# Altium PCB PowerBreakout.PcbDoc
Units mil, origin at the board's own origin, x right, y up, seen from the top; angles counter-clockwise.
Board outline 5457.68 x 2951.77 mil, 2 copper layers (Top Layer, Bottom Layer); 73 components, 35 nets, 208 pads, 167 vias.
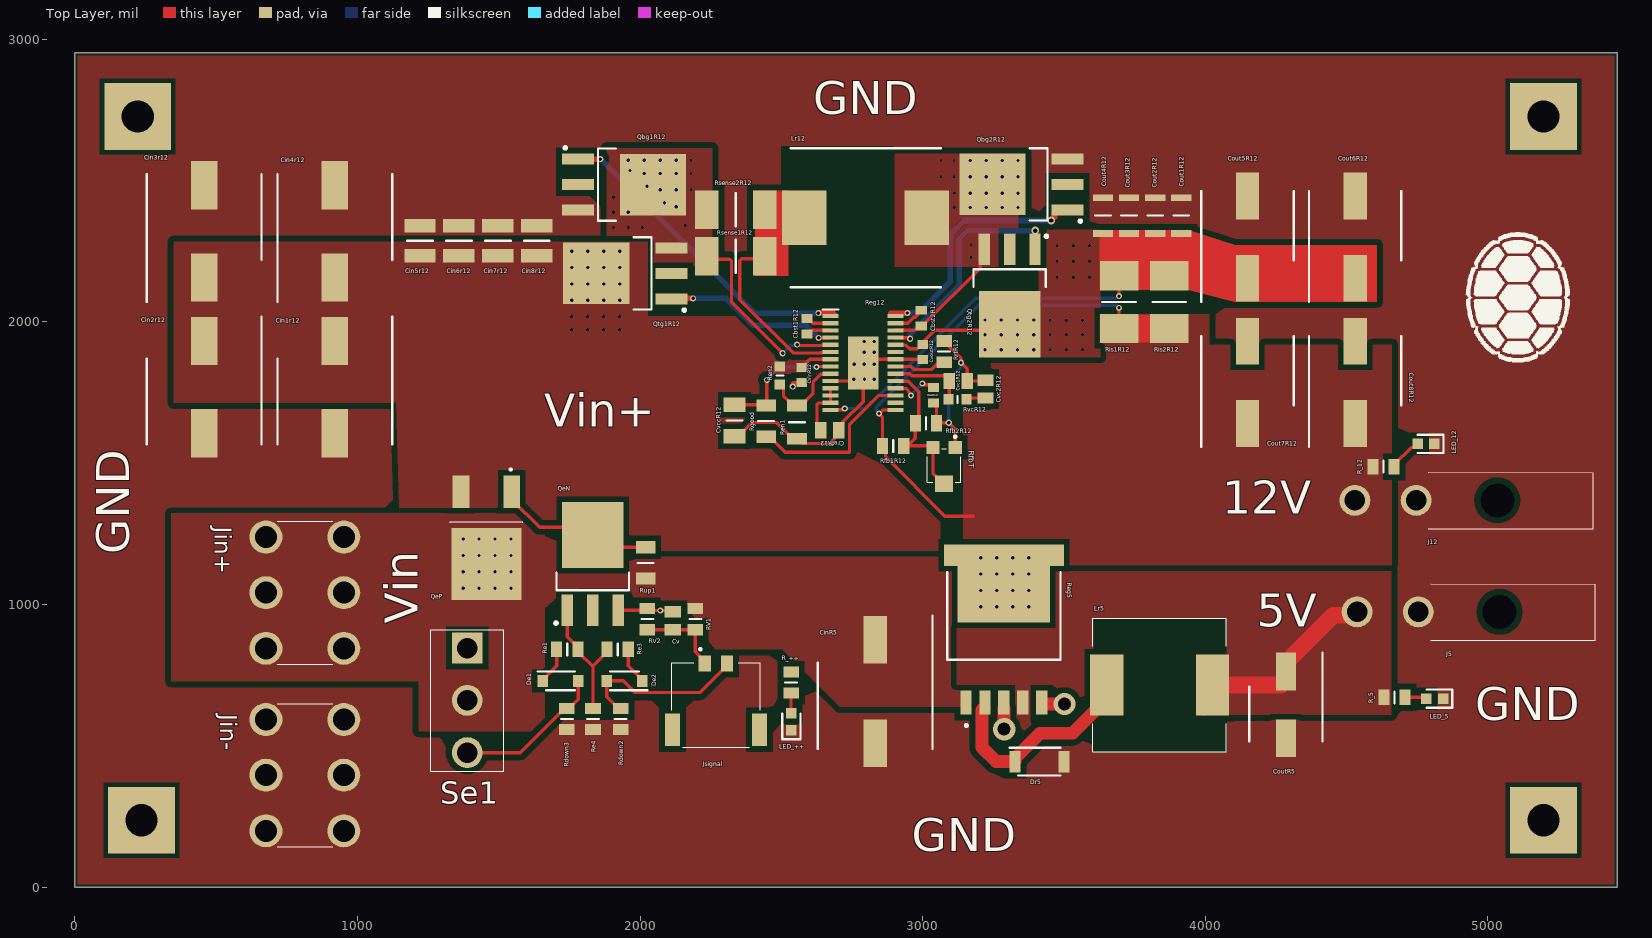
[diagram p0: Top Layer view]
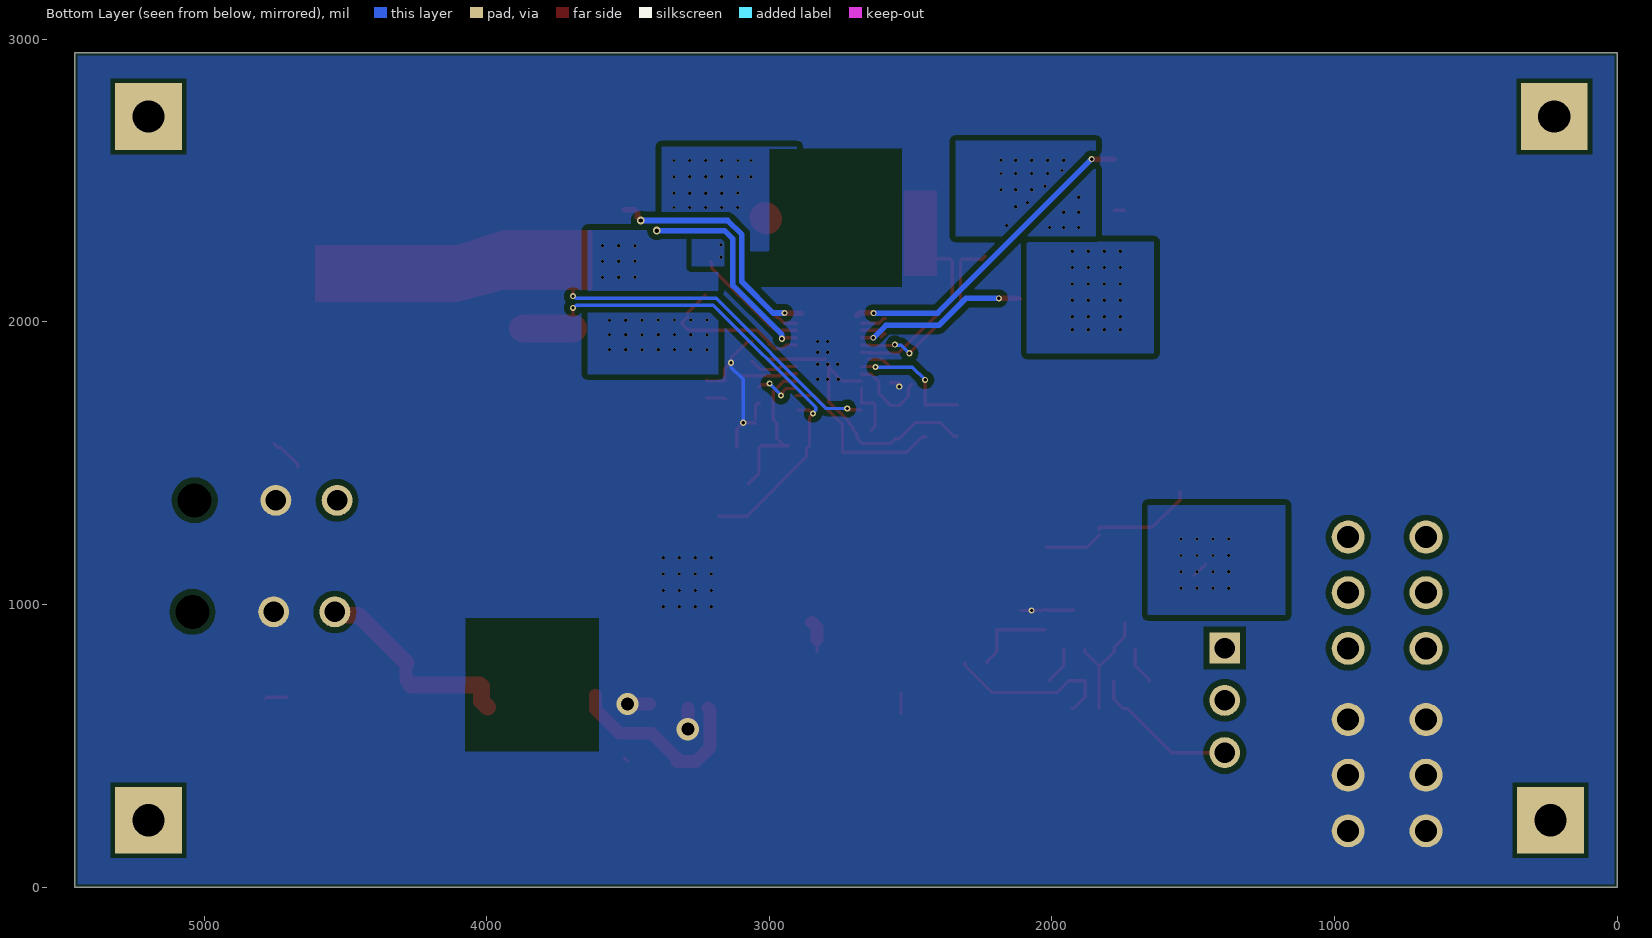
[diagram p1: Bottom Layer view, seen from below]
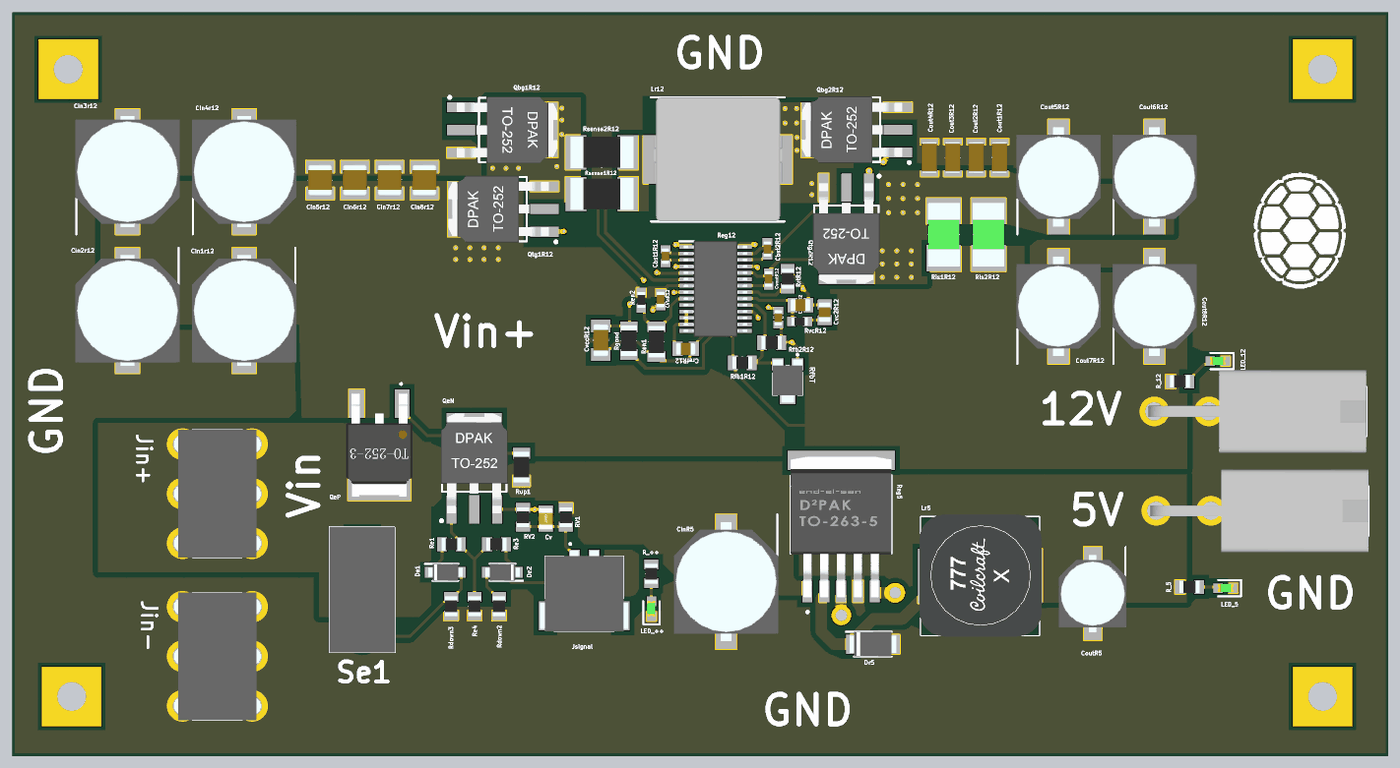
[diagram p2: 3D render of the assembled board from above, using the file's embedded part models]

## Layer stack, top to bottom
Top Solder: solder mask 0.4, Solder Resist, Dk 3.5
Top Layer: signal copper 4.1339
Dielectric 1: dielectric 12.6, FR-4, Dk 4.8
Bottom Layer: signal copper 4.1339
Bottom Solder: solder mask 0.4, Solder Resist, Dk 3.5

## Board outline
0,0 5457.68,0 5457.68,2951.77 0,2951.77

## Design rules (kind name [scope] priority, off if disabled: settings)
Clearance PolyClearance [InNamedPolygon('1_5V_L01_P009') Or InNamedPolygon('1_12V_L01_P007') Or InNamedPolygon('NETCBST1R12_1_L01_P010') Or InNamedPolygon('NETCBST2R12_1_L01_P001') Or InNamedPolygon('NETCOUT1R12_1_L01_P002') Or InNamedPolygon('P1++_L01_P005') Or InNamedPolygon('P1+_L01_P006') Or InNamedPolygon('P1+_L01_P011') Or InNamedPolygon('P1-_L01_P017') Or InNamedPolygon('NETCBST1R12_1_L02_P000') Or InNamedPolygon('NETCBST2R12_1_L02_P013') Or InNamedPolygon('NETCOUT1R12_1_L02_P014') Or InNamedPolygon('P1++_L02_P012') Or InNamedPolygon('P1+_L02_P015') Or InNamedPolygon('P1-_L02_P016')] p1: gap=20.39 ignorepadtopadclearanceinfootprint=FALSE
Clearance Clearance_1 [All] p2: gap=10 ignorepadtopadclearanceinfootprint=FALSE
PolygonConnect [All] p1: connectstyle=Direct reliefconductorwidth=10 reliefentries=4 polygonreliefangle="90 Angle" airgapwidth=10
RoutingVias [All] p1: holewidth=11.81 width=21.65 viastyle="Through Hole" minholewidth=7.87 minwidth=11.81 maxholewidth=45.67 maxwidth=78.74
SolderMaskExpansion [All] p1: expansion=4 istentingtop=FALSE
UnRoutedNet [All] p1: checkbadconnections=TRUE
Width [All] p1: maxlimit=282.68 minlimit=11.81 preferedwidth=11.81 minimp=50.000000 maximp=50.000000 favimp=50.000000
29 further rules are at their usual default settings.

## Components (designator, comment, footprint, x,y, rotation, side; value= is the part's Value field where it differs from the comment)
Cbst1R12 "0.1uF" CAPC1608X90N 2590.55,1984.25 r90 top
Cbst2R12 "0.1uF" CAPC1608X90N 2995.08,2012.8 r90 top
Cin1r12 "150uF" CAPAE1030X1650N 920.28,1768.7 r270 top
Cin2r12 "150uF" CAPAE1030X1650N 457.61,1768.7 r270 top
Cin3r12 "150uF" CAPAE1030X1650N 457.61,2319.88 r90 top
Cin4r12 "150uF" CAPAE1030X1650N 920.28,2319.88 r90 top
Cin5r12 "10uF" CAPC3225X280N 1221.46,2286.42 r90 top
Cin6r12 "10uF" CAPC3225X280N 1359.25,2286.42 r90 top
Cin7r12 "10uF" CAPC3225X280N 1497.05,2286.42 r90 top
Cin8r12 "10uF" CAPC3225X280N 1634.84,2286.42 r90 top
CinR5 "680uF" CAPAE1030X1050N 2831.69,691.93 r270 top
Cout1R12 "47uF" CAPC3216X180N 3915.35,2375.98 r90 top
Cout2R12 "47uF" CAPC3216X180N 3822.83,2375.98 r90 top
Cout3R12 "47uF" CAPC3216X180N 3730.31,2375.98 r90 top
Cout4R12 "47uF" CAPC3216X180N 3637.8,2375.98 r90 top
Cout5R12 "560uF" CAPAE830X1050N 4149.61,2299.21 r90 top
Cout6R12 "560uF" CAPAE830X1050N 4530.18,2299.21 r90 top
Cout7R12 "560uF" CAPAE830X1050N 4149.61,1785.43 r90 top
Cout8R12 "560uF" CAPAE830X1050N 4530.18,1785.43 r90 top
CoutR5 "220uF" CAPAE660X800N 4285.43,644.69 r270 top
CrefR12 "0.47uF" CAPC2012X140N 2671.26,1616.14 r0 top
CssR12 "0.1uF" CAPC1608X90N 3038.39,1740.16 r270 top
Cv "0.1uF" CAPC2012X100N 2116.14,942.32 r270 top
Cvc1R12 "100pF" CAPC2012X88N 3125.98,1790.35 r0 top
Cvc2R12 "15nF" CAPC2012X88N 3222.44,1761.81 r90 top
CvccR12 "4.7uF" CAPC3316X195N 2334.65,1650.59 r270 top
CVinR12 "1uF" CAPC1608X50N 2571.85,1812.01 r270 top
CvoutR12 "TMK107BLD105MA-T" CAPC1608X50N 3000,1893.7 r270 top
De1 "Schottky Diode" SODFL3517X110N 1718.5,729.33 r0 top
De2 "Schottky Diode" SODFL3517X110N 1944.88,729.33 r180 top
Dr5 "Schottky Diode" SODFL4725X110N 3413.39,443.9 r0 top
J5 "76825-0002" 768250002 4958.66,973.43 r90 top
J12 "76825-0002" 768250002 4950.79,1368.11 r90 top
Jin+ "7798" 7798 951.77,844.49 r90 top
Jin- "7798" 7798 951.77,198.82 r90 top
Jsignal "205338-0002" 2053380002 2268.7,791.34 r180 top
LED_5 "150060VS75000" LEDC1608X80N 4812.01,666.4 r180 top
LED_12 "150060VS75000" LEDC1608X80N 4781.5,1567.91 r180 top
LED_++ "150060VS75000" LEDC1608X80N 2535.43,584.65 r90 top
Lr5 "33uH" MSS1210333MEB 3838.58,714.57 r90 top
Lr12 "3.3uH" INDPM135125X650N 2798.23,2368.11 r0 top
Qbg1R12 "NTD5865NLT4G" TO229P990X238-4N 1943.9,2485.24 r0 top
Qbg2R12 "NTD5865NLT4G" TO229P990X238-4N 3349.41,2486.22 r180 top
QeN "N Channel" TO229P990X238-4N 1832.68,1142.72 r90 top
QeP "P Channel" STD36P4LLF6 1456.26,1266.61 r180 top
Qtg1R12 "NTD5865NLT4G" TO229P990X238-4N 1947.83,2171.26 r180 top
Qtg2R12 "NTD5865NLT4G" TO229P990X238-4N 3308.07,2093.5 r270 top
R_5 "150 Ohm" RESC2012X60N 4669.29,671.26 r180 top
R_12 "499 Ohm" RESC2012X60N 4630.91,1487.2 r180 top
R_++ "499 Ohm" RESC2012X60N 2534.45,723.43 r90 top
Rdown2 "10k" RESC2012X60N 1931.1,594.49 r270 top
Rdown3 "10k" RESC2012X60N 1741.14,594.49 r270 top
Re1 "10k" RESC2012X60N 1742.52,840.55 r180 top
Re3 "10k" RESC2012X60N 1920.87,840.55 r0 top
Re4 "10k" RESC2012X60N 1833.66,594.49 r270 top
Reg5 "LM2596S-5.0_NOPB" KTT0005B 3287.4,1144.13 r270 top
Reg12 "LT8390EFE#PBF" SOP65P640X120-29N 2789.37,1854.33 r0 top
Ren1 "56.2k" RESC3216X60N 2555.12,1644.68 r270 top
Ren2 "365k" RESC1608X55N 2495.08,1810.04 r270 top
Rfb1R12 "549k" RESC2012X65N 2895.67,1561.02 r0 top
Rfb2R12 "49.9k" RESC2113X66N 3011.81,1640.75 r0 top
RfbT "35WR100KLFTR" 35WR100KLFTR 3075.79,1491.14 r270 top
Rgood "100k" RESC3116X65N 2445.87,1648.62 r270 top
Ris1R12 "6m" FUSC6432X52N 3694.88,2069.88 r270 top
Ris2R12 "6m" FUSC6432X52N 3872.05,2069.88 r270 top
RrtR12 "309k" RESC2012X70N 3075.79,1894.68 r90 top
Rsense1R12 "2m" RESC6432X70N 2338.58,2231.3 r0 top
Rsense2R12 "2m" RESC6432X70N 2338.58,2396.65 r0 top
Rup1 "4.7k" RESC3116X65N 2019.68,1146.65 r270 top
RV1 "30k" RESC2012X60N 2195.87,947.83 r270 top
RV2 "10k" RESC2012X60N 2025.89,947.83 r270 top
RvcR12 "15k" RESC1608X55N 3123.03,1725.39 r0 top
Se1 "Manual Switch" 2M1SP3T1B1M2QE 1388.78,845.47 r270 top

## Footprints (in the part's own frame and the unit in brackets; to place one, negate y for a bottom-side part, rotate by r counter-clockwise, add the part's x,y. Pads: shape width x height; smd on the part's side, far side on the other; paste and mask are expansions set on the pad)
2M1SP3T1B1M2QE [mm]
  rect 2.775x2.775 hole 1.85: 1(0,0)
  round 2.775 hole 1.85: 2(4.7,0) 3(9.4,0)
  silkscreen extent -1.65,-3.3 11.05,3.3, body extent -1.65,-3.3 11.05,3.3, height 28.3
35WR100KLFTR [mm]
  rect 1.2x1.2 smd: 1(-1.625,1) 3(-1.625,-1)
  rect 1.5x1.6 smd: 2(1.625,0)
  silkscreen extent -2.7,-1.5 1.5,1.5, body extent -2.1,-1.5 2.22,1.5, height 1.9
7798 [mm]
  round 2.97 hole 1.98: 1(0,0) 2(5,0) 3(10,0) 4(10,7) 5(5,7) 6(0,7)
  silkscreen extent -1.44,1 11.44,6, body extent -1.44,-0.89 11.44,7.89, height 6.45
768250002 [mm]
  round 2.775 hole 1.85: 1(0,10.7) 2(0,5.2)
  round 1.525 hole 3.05 unplated: 3(0,-2.1)
  silkscreen extent -2.54,-10.7 2.54,4.1, body extent -4.18,-10.65 4.17,11.31, height 14.5
2053380002 [mm]
  rect 1.1x1.45 smd: 1(1,0) 2(-1,0)
  rect 1.35x2.9 smd: MP1(3.895,5.975) MP2(-3.895,5.975)
  silkscreen extent -3.98,-1.37 3.98,7.52, body extent -4.44,-0.62 4.44,7.52, height 2.9
CAPAE660X800N [mm]
  rect 3.4x1.8 smd: 1(-3,0) 2(3,0)
  silkscreen extent -4.7,-3.3 3.3,3.3, body extent -3.9,-3.4 3.9,3.4, height 8
CAPAE830X1050N [mm]
  rect 4.2x2.1 smd: 1(-3.7,0) 2(3.7,0)
  silkscreen extent -5.8,-4.15 4.15,4.15, body extent -5,-4.25 5,4.25, height 10.5
CAPAE1030X1050N [mm]
  rect 4.3x2.1 smd: 1(-4.65,0) 2(4.65,0)
  silkscreen extent -6.8,-5.15 5.15,5.15, body extent -6,-5.25 6,5.25, height 10.5
CAPAE1030X1650N [mm]
  rect 4.35x2.4 smd: 1(-4.15,0) 2(4.15,0)
  silkscreen extent -6.32,-5.15 5.15,5.15, body extent -5.6,-5.25 5.6,5.25, height 16.5
CAPC1608X50N [mm]
  rect 0.81x0.94 smd: 1(-0.67,0) 2(0.67,0)
  body extent -0.8,-0.4 0.8,0.4, height 0.5
CAPC1608X90N [mm]
  rect 0.78x0.99 smd: 1(-0.7,0) 2(0.7,0)
  body extent -0.8,-0.41 0.8,0.41, height 0.9
CAPC2012X88N [mm]
  rect 1.02x1.47 smd: 1(-0.8,0) 2(0.8,0)
  body extent -1,-0.63 1,0.63, height 0.88
CAPC2012X100N [mm]
  rect 1.02x1.47 smd: 1(-0.8,0) 2(0.8,0)
  body extent -1.1,-0.72 1.1,0.73, height 1
CAPC2012X140N [mm]
  rect 1.02x1.47 smd: 1(-0.81,0) 2(0.81,0)
  body extent -1,-0.63 1,0.63, height 1.4
CAPC3216X180N [mm]
  rect 0.62x1.82 smd: 1(-1.6,0) 2(1.6,0)
  silkscreen extent 0,-0.7 0,0.7, body extent -1.6,-0.8 1.6,0.8, height 1.8
CAPC3225X280N [mm]
  rect 1.22x2.82 smd: 1(-1.35,0) 2(1.35,0)
  silkscreen extent 0,-1.15 0,1.15, body extent -1.6,-1.25 1.6,1.25, height 2.8
CAPC3316X195N [mm]
  rect 1.28x1.96 smd: 1(-1.42,0) 2(1.42,0)
  silkscreen extent 0,-0.7 0,0.7, body extent -1.65,-0.8 1.65,0.8, height 1.95
FUSC6432X52N [mm]
  rect 2.63x3.46 smd: 1(-2.37,0) 2(2.37,0)
  silkscreen extent 0,-1.5 0,1.5, body extent -3.2,-1.6 3.2,1.6, height 0.52
INDPM135125X650N [mm]
  rect 4x4.9 smd: 1(-5.5,0) 2(5.5,0)
  silkscreen extent -6.75,-6.25 6.75,6.25, body extent -6.42,-6.22 6.48,6.28, height 6.32
KTT0005B [mm]
  rect 2.16x1.02 smd: 1(12.461,-3.4) 2(12.461,-1.7) 3(12.461,0) 4(12.461,1.7) 5(12.461,3.4)
  rect 6.99x8.33 smd: 6(1.786,0)
  rect 1.91x1.235 smd: 7(-0.754,4.782) 8(-0.754,-4.782)
  silkscreen extent 0.76,-5.08 14.68,5.08, body extent -1.15,-5.08 13.09,5.08, height 4.87
LEDC1608X80N [mm]
  rect 0.95x0.95 smd: 1(-0.75,0) 2(0.75,0)
  silkscreen extent -1.58,-0.82 0.75,0.82, body extent -0.8,-0.4 0.8,0.4, height 0.81
MSS1210333MEB [mm]
  rect 5.5x3 smd: 1(0,4.75) 2(0,-4.75)
  silkscreen extent -6,-6 6,6, body extent -6.1,-6.2 6.2,6.1, height 10.17
RESC1608X55N [mm]
  rect 0.9x0.95 smd: 1(-0.8,0) 2(0.8,0)
  silkscreen extent 0,-0.3 0,0.3, body extent -0.8,-0.4 0.8,0.4, height 0.55
RESC2012X60N [mm]
  rect 1x1.4 smd: 1(-0.95,0) 2(0.95,0)
  silkscreen extent 0,-0.53 0,0.53, body extent -1,-0.63 1,0.63, height 0.6
RESC2012X65N [mm]
  rect 1x1.45 smd: 1(-0.95,0) 2(0.95,0)
  silkscreen extent 0,-0.53 0,0.53, body extent -1,-0.63 1,0.63, height 0.65
RESC2012X70N [mm]
  rect 1.05x1.4 smd: 1(-0.95,0) 2(0.95,0)
  silkscreen extent 0,-0.53 0,0.53, body extent -1,-0.63 1,0.63, height 0.7
RESC2113X66N [mm]
  rect 1x1.45 smd: 1(-0.95,0) 2(0.95,0)
  silkscreen extent 0,-0.54 0,0.54, body extent -1.03,-0.64 1.03,0.64, height 0.66
RESC3116X65N [mm]
  rect 1.1x1.75 smd: 1(-1.4,0) 2(1.4,0)
  silkscreen extent 0,-0.7 0,0.7, body extent -1.55,-0.8 1.55,0.8, height 0.65
RESC3216X60N [mm]
  rect 1.05x1.8 smd: 1(-1.5,0) 2(1.5,0)
  silkscreen extent 0,-0.7 0,0.7, body extent -1.58,-0.8 1.58,0.8, height 0.6
RESC6432X70N [mm]
  rect 2.1x3.45 smd: 1(-2.6,0) 2(2.6,0)
  silkscreen extent 0,-1.49 0,1.49, body extent -3.17,-1.59 3.17,1.59, height 0.7
SODFL3517X110N [mm]
  rect 0.92x1.08 smd: 1(-1.6,0) 2(1.6,0)
  silkscreen extent -2.06,-0.85 1.3,0.85, body extent -1.75,-0.85 1.75,0.85, height 1.1
SODFL4725X110N [mm]
  rect 1x1.93 smd: 1(-2.2,0) 2(2.2,0)
  silkscreen extent -2.7,-1.25 1.9,1.25, body extent -2.35,-1.25 2.35,1.25, height 1.1
SOP65P640X120-29N [mm]
  rect 1.45x0.381 smd: 1(-2.925,4.225) 2(-2.925,3.575) 3(-2.925,2.925) 4(-2.925,2.275) 5(-2.925,1.625) 6(-2.925,0.975) 7(-2.925,0.325) 8(-2.925,-0.325) 9(-2.925,-0.975) 10(-2.925,-1.625) 11(-2.925,-2.275) 12(-2.925,-2.925) 13(-2.925,-3.575) 14(-2.925,-4.225) 15(2.925,-4.225) 16(2.925,-3.575) 17(2.925,-2.925) 18(2.925,-2.275) 19(2.925,-1.625) 20(2.925,-0.975) 21(2.925,-0.325) 22(2.925,0.325) 23(2.925,0.975) 24(2.925,1.625) 25(2.925,2.275) 26(2.925,2.925) 27(2.925,3.575) 28(2.925,4.225)
  rect 2.74x4.75 smd: 29(0,0)
  silkscreen extent -3.65,4.8 -2.2,4.8, body extent -3.2,-4.85 3.2,4.85, height 1.2
STD36P4LLF6 [mm]
  rect 1.5x2.9 smd: 1(-2.286,-3.353) 3(2.286,-3.353)
  rect 6.3x6.5 smd: 2(0,3.147)
  silkscreen extent -3.25,-5.45 3.25,-0.55, body extent -3.35,-4.35 3.35,6, height 2.42
TO229P990X238-4N [mm]
  rect 2.85x1 smd: 1(-4.15,2.29) 2(-4.15,0) 3(-4.15,-2.29)
  rect 5.95x5.55 smd: 4(2.6,0)
  silkscreen extent -5.42,-3.25 -0.75,3.42, body extent -4.57,-3.37 5.53,3.37, height 2.41

## Part data
Cbst1R12 Cbst2R12 CssR12: library part 06033C104J4Z2A, "Capacitor", Manufacturer_Name=AVX, Mouser Part Number=581-06033C104J4Z2A, Datasheet Link=https://componentsearchengine.com/Datasheets/1/06031A100FAT2A.pdf, Height=0.9mm, Manufacturer_Part_Number=06033C104J4Z2A, Mouser Price/Stock=https://www.mouser.co.uk/ProductDetail/AVX/06033C104J4Z2A/?qs=%252BdQmOuGyFcHWXuPUAM5ybw%3D%3D
Cin1r12 Cin2r12 Cin3r12 Cin4r12: library part EEH-ZS1J151P, "Capacitor Polarised", Manufacturer_Name=Panasonic, Mouser Part Number=667-EEH-ZS1J151P, Arrow Part Number=EEH-ZS1J151P, Arrow Price/Stock=https://www.arrow.com/en/products/eeh-zs1j151p/panasonic, Datasheet Link=https://industrial.panasonic.com/cdbs/www-data/pdf/RDD0000/RDD0000C1244.pdf, Height=16.5mm, Manufacturer_Part_Number=EEH-ZS1J151P, Mouser Price/Stock=https://www.mouser.co.uk/ProductDetail/Panasonic/EEH-ZS1J151P?qs=byeeYqUIh0Ma2Xd%2FUydcug%3D%3D
Cin5r12 Cin6r12 Cin7r12 Cin8r12: library part UMR325AC7106KM-P, "Capacitor", Manufacturer_Name="TAIYO YUDEN", Mouser Part Number=963-UMR325AC7106KM-P, Datasheet Link=https://www.mouser.it/datasheet/2/396/TaiyoYuden_UMR325AC7106KM-P_SS-1888197.pdf, Height=2.8mm, Manufacturer_Part_Number=UMR325AC7106KM-P, Mouser Price/Stock=https://www.mouser.co.uk/ProductDetail/Taiyo-Yuden/UMR325AC7106KM-P?qs=W%2FMpXkg%252BdQ6B9FeGpdJ2Gw%3D%3D
CinR5: library part EEE-FK1C681GP, "Capacitor Polarised", Manufacturer_Name=Panasonic, Mouser Part Number=667-EEE-FK1C681GP, Arrow Part Number=EEE-FK1C681GP, Arrow Price/Stock=https://www.arrow.com/en/products/eee-fk1c681gp/panasonic, Datasheet Link=https://www.arrow.com/en/products/eee-fk1c681gp/panasonic, Height=10.5mm, Manufacturer_Part_Number=EEE-FK1C681GP, Mouser Price/Stock=https://www.mouser.com/Search/Refine.aspx?Keyword=667-EEE-FK1C681GP
Cout1R12 Cout2R12 Cout3R12 Cout4R12: library part C3216X5R1E476M160AC, "Capacitor", Manufacturer_Name=TDK, Mouser Part Number=810-C3216X5R1E476M, Arrow Part Number=C3216X5R1E476M160AC, Arrow Price/Stock=https://www.arrow.com/en/products/c3216x5r1e476m160ac/tdk, Datasheet Link=https://product.tdk.com/info/en/catalog/datasheets/mlcc_commercial_midvoltage_en.pdf, Height=1.8mm, Manufacturer_Part_Number=C3216X5R1E476M160AC, Mouser Price/Stock=https://www.mouser.co.uk/ProductDetail/TDK/C3216X5R1E476M160AC?qs=NRhsANhppD%252BqapdVvBvu4Q%3D%3D
Cout5R12 Cout6R12 Cout7R12 Cout8R12: library part EEE-FT1E561UP, "Capacitor", Manufacturer_Name=Panasonic, Mouser Part Number=667-EEE-FT1E561UP, Arrow Part Number=EEE-FT1E561UP, Arrow Price/Stock=https://www.arrow.com/en/products/eee-ft1e561up/panasonic, Datasheet Link=https://componentsearchengine.com/Datasheets/1/EEE-FT1E561UP.pdf, Height=10.5mm, Manufacturer_Part_Number=EEE-FT1E561UP, Mouser Price/Stock=https://www.mouser.com/Search/Refine.aspx?Keyword=667-EEE-FT1E561UP
CoutR5: library part EEE-FKA221XAP, "Capacitor Polarised", Manufacturer_Name=Panasonic, Mouser Part Number=667-EEE-FKA221XAP, Datasheet Link=https://eu.mouser.com/datasheet/2/315/ABA0000C1175-947561.pdf, Height=8mm, Manufacturer_Part_Number=EEE-FKA221XAP, Mouser Price/Stock=https://www.mouser.com/Search/Refine.aspx?Keyword=667-EEE-FKA221XAP
CrefR12: library part 08053C474KAT2A, "Capacitor", Manufacturer_Name=AVX, Mouser Part Number=581-08053C474KAT2A, Datasheet Link=http://www.mouser.com/ds/2/40/X7RDielectric-777024.pdf, Height=1.4mm, Manufacturer_Part_Number=08053C474KAT2A, Mouser Price/Stock=https://www.mouser.co.uk/ProductDetail/AVX/08053C474KAT2A?qs=KSXCHhUSl%2FcOKBGY0p43NQ%3D%3D
Cv: library part C0805C101FCGACAUTO, "Capacitor", Manufacturer_Name=Kemet, Mouser Part Number=80-C0805C101FCGACAUT, Datasheet Link=https://content.kemet.com/datasheets/KEM_C1091_C0G_ESD.pdf, Height=1mm, Manufacturer_Part_Number=C0805C101FCGACAUTO, Mouser Price/Stock=https://www.mouser.co.uk/ProductDetail/KEMET/C0805C101FCGACAUTO/?qs=OlC7AqGiEDnYvzW7uZC9yw%3D%3D
Cvc1R12: library part C0805C101J5RACTU, "Capacitor", Manufacturer_Name=Kemet, Mouser Part Number=80-C0805C101J5R, Arrow Part Number=C0805C101J5RACTU, Arrow Price/Stock=https://www.arrow.com/en/products/c0805c101j5ractu/kemet-corporation, Datasheet Link=https://api.kemet.com/component-edge/download/datasheet/C0805C101J5RACTU.pdf, Height=0.88mm, Manufacturer_Part_Number=C0805C101J5RACTU, Mouser Price/Stock=https://www.mouser.co.uk/ProductDetail/KEMET/C0805C101J5RACTU?qs=1CrpdQ4AkN%2FJNeoQfmjuPQ%3D%3D
Cvc2R12: library part C0805C151JAGACTU, "Capacitor", Manufacturer_Name=Kemet, Mouser Part Number=80-C0805C151JAGACTU, Datasheet Link=https://www.mouser.ch/datasheet/2/212/KEM_C1003_C0G_SMD-1101588.pdf, Height=0.88mm, Manufacturer_Part_Number=C0805C151JAGACTU, Mouser Price/Stock=https://www.mouser.co.uk/ProductDetail/KEMET/C0805C151JAGACTU?qs=rrS6PyfT74cmtFsCFUoXhw%3D%3D
CvccR12: library part C1206X475K3RACAUTO7210, "Capacitor", Manufacturer_Name=Kemet, Mouser Part Number=80-C1206X475K3RAUTLR, Datasheet Link=https://www.mouser.com/datasheet/2/212/1/KEM_C1078_X7R_FT_CAP_AUTO_SMD-1103315.pdf, Height=1.95mm, Manufacturer_Part_Number=C1206X475K3RACAUTO7210, Mouser Price/Stock=https://www.mouser.co.uk/ProductDetail/KEMET/C1206X475K3RACAUTO7210/?qs=ds50AKTGxA8JAgT9kv9azQ%3D%3D
CVinR12: library part TMK107BLD105MA-T, "Capacitor", Manufacturer_Name="TAIYO YUDEN", Mouser Part Number=963-TMK107BLD105MA-T, Datasheet Link=https://mouser.componentsearchengine.com/Datasheets/1/TMK107BLD105MA-T.pdf, Height=0.5mm, Manufacturer_Part_Number=TMK107BLD105MA-T, Mouser Price/Stock=https://www.mouser.co.uk/ProductDetail/Taiyo-Yuden/TMK107BLD105MA-T?qs=lkMpTOwszhd9%2FVKw3feWjA%3D%3D
CvoutR12: "Capacitor", Manufacturer_Name="TAIYO YUDEN", Mouser Part Number=963-TMK107BLD105MA-T, Datasheet Link=https://mouser.componentsearchengine.com/Datasheets/1/TMK107BLD105MA-T.pdf, Height=0.5mm, Manufacturer_Part_Number=TMK107BLD105MA-T, Mouser Price/Stock=https://www.mouser.co.uk/ProductDetail/Taiyo-Yuden/TMK107BLD105MA-T?qs=lkMpTOwszhd9%2FVKw3feWjA%3D%3D
De1 De2: library part PMEG4030ER,115, "Diode", Manufacturer_Name=Nexperia, Mouser Part Number=771-PMEG4030ER115, Arrow Part Number=PMEG4030ER,115, Arrow Price/Stock=https://www.arrow.com/en/products/pmeg4030er115/nexperia, Datasheet Link=https://assets.nexperia.com/documents/data-sheet/PMEG4030ER.pdf, Height=1.1mm, Manufacturer_Part_Number=PMEG4030ER,115, Mouser Price/Stock=https://www.mouser.co.uk/ProductDetail/Nexperia/PMEG4030ER115?qs=GcY6OjH1zdm%2Fc340ECNPOw%3D%3D
Dr5: library part PMEG4030EP,115, "Diode", Manufacturer_Name=Nexperia, Mouser Part Number=771-PMEG4030EP,115, RS Part Number=7816786P, Datasheet Link=http://www.mouser.com/ds/2/302/PMEG4030EP-842598.pdf, Height=1.1mm, Manufacturer_Part_Number=PMEG4030EP,115, Mouser Price/Stock=https://www.mouser.com/Search/Refine.aspx?Keyword=771-PMEG4030EP%2C115, RS Price/Stock=http://uk.rs-online.com/web/p/products/7816786P
J5 J12: "Connector", Manufacturer_Name=Molex, Mouser Part Number=538-76825-0002, Datasheet Link=https://www.molex.com/pdm_docs/sd/768250002_sd.pdf, Height=14mm, Manufacturer_Part_Number=76825-0002, Mouser Price/Stock=https://www.mouser.co.uk/ProductDetail/Molex/76825-0002?qs=KpdAywxU011SrMvnYgR78w%3D%3D
Jin+ Jin-: "Connector", Manufacturer_Name="Keystone Electronics", Mouser Part Number=534-7798, Datasheet Link=http://www.keyelco.com/product-pdf.cfm?p=1116, Height=6.35mm, Manufacturer_Part_Number=7798, Mouser Price/Stock=https://www.mouser.co.uk/ProductDetail/Keystone-Electronics/7798?qs=%2F%252BPMR94VuMZQhfU8Ma0DGQ%3D%3D
Jsignal: "Connector", Manufacturer_Name=Molex, Mouser Part Number=538-205338-0002, Datasheet Link=https://eu.mouser.com/datasheet/2/276/2053380002_PCB_HEADERS-1839579.pdf, Height=2.8mm, Manufacturer_Part_Number=205338-0002, Mouser Price/Stock=https://www.mouser.co.uk/ProductDetail/Molex/205338-0002?qs=GedFDFLaBXGw%2FZd7htQeEw%3D%3D
LED_5 LED_12 LED_++: "LED", Manufacturer_Name="Wurth Elektronik", Mouser Part Number=710-150060VS75000, Datasheet Link=https://componentsearchengine.com/Datasheets/2/150060VS75000.pdf, Height=0.8mm, Manufacturer_Part_Number=150060VS75000, Mouser Price/Stock=https://www.mouser.co.uk/ProductDetail/Wurth-Elektronik/150060VS75000/?qs=LlUlMxKIyB1Q1Bi5mQ%2FKLw%3D%3D
Lr5: library part MSS1210-333MEB, "Inductor", Manufacturer_Name=COILCRAFT, Mouser Part Number=994-MSS1210-333MEB, Datasheet Link=https://www.coilcraft.com/getmedia/f1a1bc5f-bdff-42f8-9ca8-1a0fb1d5094f/MSS1210.pdf, Height=10.2mm, Manufacturer_Part_Number=MSS1210-333MEB, Mouser Price/Stock=https://www.mouser.co.uk/ProductDetail/Coilcraft/MSS1210-333MEB?qs=VJjuEbE9QBMJhExHFP9gkQ%3D%3D
Lr12: library part SRP1265A-3R3M, "Inductor", Manufacturer_Name=Bourns, Mouser Part Number=652-SRP1265A-3R3M, Arrow Part Number=SRP1265A-3R3M, Arrow Price/Stock=https://www.arrow.com/en/products/srp1265a-3r3m/bourns, Datasheet Link=https://www.bourns.com/data/global/pdfs/SRP1265A.pdf, Height=6.5mm, Manufacturer_Part_Number=SRP1265A-3R3M, Mouser Price/Stock=https://www.mouser.co.uk/ProductDetail/Bourns/SRP1265A-3R3M?qs=7z%252BmIopC6%2FKn2Zz%252BiwrXSg%3D%3D
Qbg1R12 Qbg2R12 Qtg1R12 Qtg2R12: "Transistor", Manufacturer_Name="ON Semiconductor", Mouser Part Number=863-NTD5865NLT4G, Arrow Part Number=NTD5865NLT4G, Arrow Price/Stock=https://www.arrow.com/en/products/ntd5865nlt4g/on-semiconductor, Datasheet Link=http://www.onsemi.com/pub/Collateral/NTD5865NL-D.PDF, Height=2.38mm, Manufacturer_Part_Number=NTD5865NLT4G, Mouser Price/Stock=https://www.mouser.co.uk/ProductDetail/ON-Semiconductor/NTD5865NLT4G?qs=CKZJJkUYzP4m2wg5Rm81cw%3D%3D
QeN: library part NTD5865NLT4G, "Transistor", Manufacturer_Name="ON Semiconductor", Mouser Part Number=863-NTD5865NLT4G, Arrow Part Number=NTD5865NLT4G, Arrow Price/Stock=https://www.arrow.com/en/products/ntd5865nlt4g/on-semiconductor, Datasheet Link=http://www.onsemi.com/pub/Collateral/NTD5865NL-D.PDF, Height=2.38mm, Manufacturer_Part_Number=NTD5865NLT4G, Mouser Price/Stock=https://www.mouser.co.uk/ProductDetail/ON-Semiconductor/NTD5865NLT4G?qs=CKZJJkUYzP4m2wg5Rm81cw%3D%3D
QeP: library part STD36P4LLF6, "MOSFET (P-Channel)", Manufacturer_Name=STMicroelectronics, Mouser Part Number=511-STD36P4LLF6, Arrow Part Number=STD36P4LLF6, Arrow Price/Stock=https://www.arrow.com/en/products/std36p4llf6/stmicroelectronics, Datasheet Link=https://www.st.com/resource/en/datasheet/std36p4llf6.pdf, Height=2mm, Manufacturer_Part_Number=STD36P4LLF6, Mouser Price/Stock=https://www.mouser.com/Search/Refine.aspx?Keyword=511-STD36P4LLF6
R_5: library part RK73H2ATTD1500F, "Resistor", Manufacturer_Name="KOA Speer", Mouser Part Number=660-RK73H2ATTD1500F, Arrow Part Number=RK73H2ATTD1500F, Arrow Price/Stock=https://www.arrow.com/en/products/rk73h2attd1500f/koa-speer-electronics, Datasheet Link=http://www.koaspeer.com/catimages/Products/RK73H/RK73H.pdf, Height=0.6mm, Manufacturer_Part_Number=RK73H2ATTD1500F, Mouser Price/Stock=https://www.mouser.com/Search/Refine.aspx?Keyword=660-RK73H2ATTD1500F
R_12 R_++: library part RK73H2ATTD4990F, "Resistor", Manufacturer_Name="KOA Speer", Datasheet Link=http://www.koaspeer.com/catimages/Products/RK73H/RK73H.pdf, Height=0.6mm, Manufacturer_Part_Number=RK73H2ATTD4990F
Rdown2 Rdown3 Re1 Re3 Re4 RV2: library part CHP0805-FX-1002ELF, "Resistor", Manufacturer_Name=Bourns, Mouser Part Number=652-CHP0805FX1002ELF, Datasheet Link=https://ms.componentsearchengine.com/Datasheets/1/CHP0805-FX-1002ELF.pdf, Height=0.6mm, Manufacturer_Part_Number=CHP0805-FX-1002ELF, Mouser Price/Stock=https://www.mouser.co.uk/ProductDetail/Bourns/CHP0805-FX-1002ELF/?qs=lc2O%252BfHJPVaDI6gsPdDtfw%3D%3D
Reg5: "Integrated Circuit", Arrow Part Number=LM2596S-5.0/NOPB, Manufacturer_Name="Texas Instruments", Mouser Part Number=926-LM2596S-5.0/NOPB, Arrow Price/Stock=https://www.arrow.com/en/products/lm2596s-5.0nopb/texas-instruments, Datasheet Link=https://www.ti.com/lit/gpn/LM2596, Manufacturer_Part_Number=LM2596S-5.0/NOPB, Mouser Price/Stock=https://www.mouser.co.uk/ProductDetail/Texas-Instruments/LM2596S-50-NOPB?qs=X1J7HmVL2ZHVjCOmW%252BYINA%3D%3D
Reg12: "Integrated Circuit", Manufacturer_Name="Linear Technology", Mouser Part Number=584-LT8390EFE#PBF, Arrow Part Number=LT8390EFE#PBF, Arrow Price/Stock=https://www.arrow.com/en/products/lt8390efepbf/linear-technology, Datasheet Link=https://www.analog.com/media/en/technical-documentation/data-sheets/8390fa.pdf, Height=1.2mm, Manufacturer_Part_Number=LT8390EFE#PBF, Mouser Price/Stock=https://www.mouser.co.uk/ProductDetail/Analog-Devices-Linear-Technology/LT8390EFEPBF?qs=oahfZPh6IAKOx737%252BFH9lw%3D%3D
Ren1: library part CRCW120656K2FKEA, "Resistor", Manufacturer_Name=Vishay, Mouser Part Number=71-CRCW1206-56.2K-E3, Arrow Part Number=CRCW120656K2FKEA, Arrow Price/Stock=https://www.arrow.com/en/products/crcw120656k2fkea/vishay, Datasheet Link=http://www.vishay.com/docs/20035/dcrcwe3.pdf, Height=0.6mm, Manufacturer_Part_Number=CRCW120656K2FKEA, Mouser Price/Stock=https://www.mouser.co.uk/ProductDetail/Vishay-Dale/CRCW120656K2FKEA?qs=4im3x1c%252BplzUgmceNd2xig%3D%3D
Ren2: library part CR0603-FX-3653ELF, "Resistor", Manufacturer_Name=Bourns, Mouser Part Number=652-CR0603FX-3653ELF, Datasheet Link=https://www.bourns.com/pdfs/chpreztr.pdf, Height=0.55mm, Manufacturer_Part_Number=CR0603-FX-3653ELF, Mouser Price/Stock=https://www.mouser.com/Search/Refine.aspx?Keyword=652-CR0603FX-3653ELF
Rfb1R12: library part RP73D2A1M0BTDF, "Resistor", Manufacturer_Name="TE Connectivity", Mouser Part Number=279-RP73D2A1M0BTDF, Arrow Part Number=RP73D2A1M0BTDF, Arrow Price/Stock=https://www.arrow.com/en/products/rp73d2a1m0btdf/te-connectivity, Datasheet Link=https://www.mouser.com/datasheet/2/418/NG_DS_1773272_L-733409.pdf, Height=0.65mm, Manufacturer_Part_Number=RP73D2A1M0BTDF, Mouser Price/Stock=https://www.mouser.com/Search/Refine.aspx?Keyword=279-RP73D2A1M0BTDF
Rfb2R12: library part PFC-W0805LF-03-1073-B, "Resistor", Manufacturer_Name="IRC / TT Electronics", Mouser Part Number=66-PFC08LF107K-B, Arrow Part Number=PFC-W0805LF-03-1073-B, Arrow Price/Stock=https://www.arrow.com/en/products/pfc-w0805lf-03-1073-b/irc, Datasheet Link=http://www.ttelectronicsresistors.com/datasheets/pfc.pdf, Height=0.66mm, Manufacturer_Part_Number=PFC-W0805LF-03-1073-B, Mouser Price/Stock=https://www.mouser.com/Search/Refine.aspx?Keyword=66-PFC08LF107K-B
RfbT: "Variable Resistor", Manufacturer_Name="BI Technologies", Mouser Part Number=858-35WR100KLFTR, Datasheet Link=http://www.ttelectronics.com/sites/default/files/download-files/Datasheet_MultiTurn%20Trimmer_35.pdf, Height=1.8mm, Manufacturer_Part_Number=35WR100KLFTR, Mouser Price/Stock=https://www.mouser.co.uk/ProductDetail/BI-Technologies-TT-Electronics/35WR100KLFTR?qs=K%2Fj%2Fqf%252B0fqIOPAX2997AbQ%3D%3D
Rgood: library part CMP1206AFX-5601ELF, "Resistor", Manufacturer_Name=Bourns, Mouser Part Number=652-CMP1206AFX-5601L, Datasheet Link=http://www.bourns.com/docs/Product-Datasheets/CMP-A.pdf, Height=0.65mm, Manufacturer_Part_Number=CMP1206AFX-5601ELF, Mouser Price/Stock=https://www.mouser.co.uk/ProductDetail/Bourns/CMP1206AFX-5601ELF/?qs=TiOZkKH1s2RUs9dCUW7AmQ%3D%3D
Ris1R12 Ris2R12: library part PMR100HZPFU6L00, "Resistor", Manufacturer_Name="ROHM Semiconductor", Mouser Part Number=755-PMR100HZPFU6L00, Datasheet Link=https://componentsearchengine.com/Datasheets/2/PMR100HZPFU6L00.pdf, Height=0.52mm, Manufacturer_Part_Number=PMR100HZPFU6L00, Mouser Price/Stock=https://www.mouser.co.uk/ProductDetail/ROHM-Semiconductor/PMR100HZPFU6L00?qs=oBjDkOCjPF171GUXMPOJKw%3D%3D
RrtR12: library part ERJ-6ENF3093V, "Resistor", Manufacturer_Name=Panasonic, Mouser Part Number=667-ERJ-6ENF3093V, Arrow Part Number=ERJ-6ENF3093V, Arrow Price/Stock=https://www.arrow.com/en/products/erj-6enf3093v/panasonic, Datasheet Link=https://industrial.panasonic.com/cdbs/www-data/pdf/RDA0000/AOA0000C84.pdf, Height=0.7mm, Manufacturer_Part_Number=ERJ-6ENF3093V, Mouser Price/Stock=https://www.mouser.com/Search/Refine.aspx?Keyword=667-ERJ-6ENF3093V
Rsense1R12 Rsense2R12: library part ULRB22512R002FLFSLT, "Resistor", Manufacturer_Name="IRC / TT Electronics", Mouser Part Number=66-ULRB2R002FLFSLT, Datasheet Link=https://www.mouser.tw/datasheet/2/414/ULR-1528281.pdf, Height=0.7mm, Manufacturer_Part_Number=ULRB22512R002FLFSLT, Mouser Price/Stock=https://www.mouser.co.uk/ProductDetail/IRC-TT-Electronics/ULRB22512R002FLFSLT?qs=s5trV0%2FfZq%252BR4bsgICwL%252Bw%3D%3D
Rup1: library part CHP1206AFX-4701ELF, "Resistor", Manufacturer_Name=Bourns, Mouser Part Number=652-CHP1206AFX-4701L, Datasheet Link=https://www.mouser.be/datasheet/2/54/chp-a-1858677.pdf, Height=0.65mm, Manufacturer_Part_Number=CHP1206AFX-4701ELF, Mouser Price/Stock=https://www.mouser.co.uk/ProductDetail/Bourns/CHP1206AFX-4701ELF/?qs=GedFDFLaBXHtzjpWW2eupA%3D%3D
RV1: library part CRCW080530K0FKEAC, "Resistor", Manufacturer_Name=Vishay, Mouser Part Number=71-CRCW080530K0FKEAC, Arrow Part Number=CRCW080530K0FKEAC, Arrow Price/Stock=https://www.arrow.com/en/products/crcw080530k0fkeac/vishay, Datasheet Link=https://mouser.componentsearchengine.com/Datasheets/1/CRCW080530K0FKEAC.pdf, Height=0.6mm, Manufacturer_Part_Number=CRCW080530K0FKEAC, Mouser Price/Stock=https://www.mouser.com/Search/Refine.aspx?Keyword=71-CRCW080530K0FKEAC
RvcR12: library part ERA-3VEB1502V, "Resistor", Manufacturer_Name=Panasonic, Mouser Part Number=667-ERA-3VEB1502V, Datasheet Link=https://www.mouser.in/datasheet/2/315/Panasonic_Resistor_Thin_Film_(ERA-xV_2c_ERA-xK_Ser-1815278.pdf, Height=0.55mm, Manufacturer_Part_Number=ERA-3VEB1502V, Mouser Price/Stock=https://www.mouser.co.uk/ProductDetail/Panasonic/ERA-3VEB1502V?qs=OlC7AqGiEDkoKxA%252BvKCzUw%3D%3D
Se1: library part 2M1-SP1-T1-B1-M2QE, "Switch", Manufacturer_Name="Carling Technologies", Mouser Part Number=691-2M1-SP1-T1B1M2QE, RS Part Number=8798332, Datasheet Link=https://www.carlingtech.com/sites/default/files/documents/Carling-MTS-2M-Series.pdf, Height=28.2mm, Manufacturer_Part_Number=2M1-SP1-T1-B1-M2QE, Mouser Price/Stock=https://www.mouser.com/Search/Refine.aspx?Keyword=691-2M1-SP1-T1B1M2QE, RS Price/Stock=http://uk.rs-online.com/web/p/products/8798332

## Free pads (board coordinates)
  rect 236.22x236.22 hole 114.17: 3(222.44,2726.38) 3(236.22,236.22) 3(5196.85,236.22) 3(5196.85,2726.38)

## Via types
v1: diameter 11.81, hole 11.81, Top Layer to Bottom Layer, 143 vias
v2: diameter 21.65, hole 11.81, Top Layer to Bottom Layer, 19 vias
v3: diameter 27.56, hole 15.75, Top Layer to Bottom Layer, 2 vias
v4: diameter 78.74, hole 45.67, Top Layer to Bottom Layer, 2 vias
v5: diameter 21.65/19.68 (per signal layer), hole 11.81, Top Layer to Bottom Layer, 1 vias

## Nets (pads, with @x,y where several pads share a name; then routed paths per layer and width w, separated by ;. In a path a pad name is that pad's centre, name@x,y a point inside that pad or via, vN(x,y) a via of type N, cw(c..) or ccw(c..) an arc to the next point about the centre after c; other vN are vias at no path point)
1_5V: CoutR5.1 J5.1 Lr5.2 R_5.2 Reg5.4 | length 739.1
  Top Layer w45.67: CoutR5.1@4268.7,714.57 4285.43,731.3 CoutR5.1 CoutR5.1@4285.43,794.29 ; J5.1@4525.24,961.26 J5.1
  Top Layer w59.06: Lr5.2@3996.06,635.83 4018.7,658.46 Lr5.2@4018.7,709.65 ; Lr5.2 CoutR5.1@4268.7,714.57 ; CoutR5.1@4285.43,794.29 4452.4,961.26 J5.1@4525.24,961.26
1_12V: Cout7R12.1 Cout8R12.1 J12.1 R_12.2 Reg12.15 Rfb1R12.1 Ris1R12.2 Ris2R12.2 | length 1908.5
  Top Layer w11.81: Reg12.15@2899.59,1687.99 2860.93,1687.99 2848.14,1675.2 v2(2845.47,1675.2) 2845.47,1672.53 2858.27,1659.74 Rfb1R12.1 2868.83,1550.46 2868.83,1521.92 3078.74,1312.01 3179.13,1312.01 ; Ris1R12.2 v2(3694.88,2049.18)
  Top Layer w98.43: Ris1R12.2 Ris2R12.2
  Bottom Layer w11.81: v2(2845.47,1675.2) 2845.47,1677.17 2835.6,1687.04 2835.6,1696.82 3197.83,2059.06 3683.04,2059.06 3692.91,2049.18 v2(3694.88,2049.18)
NetCbst1R12_1: Cbst1R12.1 Qbg1R12.4 Qtg1R12.3 Reg12.3 Reg12.5 Rsense1R12.1 Rsense2R12.1 | length 780
  Top Layer w11.81: Rsense1R12.1 2246.06,2221.46 2316.9,2221.46 2323.82,2214.54 2323.82,2069.48 v2(2504.72,1888.58) ; v2(2556.1,1919.29) 2558.77,1919.29 2561.88,1916.18 2642.96,1916.18 2643.49,1916.71 Reg12.5@2672.62,1916.71 ; Cbst1R12.1 Cbst1R12.1@2594.69,1956.69 ; Cbst1R12.1@2604.13,1947.24 Cbst1R12.1@2594.69,1956.69 ; Reg12.3 2674.06,1969.65 2607.64,1969.65 Cbst1R12.1@2594.69,1956.69
  Bottom Layer w11.81: v2(2504.72,1888.58) 2533.55,1917.41 2554.22,1917.41 v2(2556.1,1919.29)
  other v1: 1905.51,2333.66 1958.66,2333.66 2007.87,2333.66 2160.43,2340.55 1905.51,2387.3 1958.66,2387.3 2127.95,2407.48 2086.61,2421.26 1905.51,2440.94 2071.52,2467.52 2127.95,2467.52 2180.12,2467.52 2024.61,2479.33 2015.09,2524.61 2071.52,2524.61 2127.95,2524.61 2180.12,2524.61 1964.57,2535.43 1958.66,2571.85 2015.09,2571.85 2071.52,2571.85 2127.95,2571.85 2180.12,2571.85
NetCbst1R12_2: Cbst1R12.2 Reg12.2 | length 90.6
  Top Layer w11.81: Cbst1R12.2 2594.69,2011.81 2611.42,1995.08 Reg12.2
NetCbst2R12_1: Cbst2R12.1 Lr12.2 Qbg2R12.4 Qtg2R12.3 Reg12.26 | length 417.9
  Top Layer w11.81: Reg12.26 2905.51,1970.47 2971.49,1970.47 2976.81,1975.79 2985.63,1975.79 Cbst2R12.1 ; Cbst2R12.1@2999.21,1985.24 3204.13,2190.16 3204.13,2206.69 Qtg2R12.3@3209.65,2212.2
  Top Layer w110.24: Lr12.2@3010.04,2363.38 Lr12.2
  other v1: 3171.26,2228.35 3171.26,2272.64 3112.2,2404.53 3168.31,2404.53 3224.74,2404.53 3281.17,2404.53 3337.6,2404.53 3168.31,2454.72 3224.74,2454.72 3281.17,2454.72 3337.6,2454.72 3112.2,2455.71 3064.96,2512.8 3111.22,2512.8 3168.31,2512.8 3224.74,2512.8 3281.17,2512.8 3337.6,2512.8 3064.96,2570.87 3111.22,2570.87 3168.31,2570.87 3224.74,2570.87 3281.17,2570.87 3337.6,2570.87
NetCbst2R12_2: Cbst2R12.2 Reg12.27 | length 113.8
  Top Layer w11.81: Reg12.27 2947.83,1995.08 2958.42,2005.66 2958.42,2005.91 2969,2016.5 2974.58,2016.5 2981.5,2023.41 2981.5,2030.91 2990.95,2040.35 Cbst2R12.2
NetCout1R12_1: Cout1R12.1 Cout2R12.1 Cout3R12.1 Cout4R12.1 Cout5R12.1 Cout6R12.1 CvoutR12.1 Qtg2R12.4 Reg12.14 Reg12.24 Ris1R12.1 Ris2R12.1 | length 1830
  Top Layer w11.81: Reg12.14@2677.17,1687.01 2678.41,1688.25 2717.08,1688.25 2721.75,1692.91 v2(2724.41,1692.91) ; Reg12.24 2905.24,1917.59 2940.68,1917.59 2954.14,1904.13 2981.49,1904.13 2997.44,1920.08 CvoutR12.1 ; CvoutR12.1@2996.85,1923.23 3003.74,1930.12 3003.74,1930.88 3043.34,1970.47 3287.4,1970.47 Qtg2R12.4 3308.07,1999.02 Qtg2R12.4@3289.04,2018.04 ; Qtg2R12.4@3226.41,2094.46 Qtg2R12.4@3290.03,2030.84 ; v2(3694.88,2090.58) Ris1R12.1
  Bottom Layer w11.81: v2(2724.41,1692.91) 2798.23,1692.91 3187.99,2082.68 3684.32,2082.68 3692.22,2090.58 v2(3694.88,2090.58)
  other v1: 3220.47,1900.59 3278.05,1900.59 3335.63,1900.59 3393.21,1900.59 3450.79,1900.59 3508.37,1900.59 3565.94,1900.59 3220.47,1953.58 3278.05,1953.58 3335.63,1953.58 3393.21,1953.58 3450.79,1953.58 3508.37,1953.58 3565.94,1953.58 3450.79,2005.58 3508.37,2005.58 3565.94,2005.58 3220.47,2006.56 3278.05,2006.56 3335.63,2006.56 3393.21,2006.56 3475.39,2157.15 3532.97,2157.15 3590.55,2157.15 3475.39,2213.58 3532.97,2213.58 3590.55,2213.58 3475.39,2269.03 3532.97,2269.03 3590.55,2269.03
NetCrefR12_1: CrefR12.1 Reg12.11 Reg12.12 Reg12.13 | length 196.9
  Top Layer w11.81: CrefR12.1 2625.98,1629.53 2625.98,1705.84 2632.9,1712.76 2673.39,1712.76 Reg12.13 ; Reg12.13@2674.21,1714.57 Reg12.12 Reg12.11
NetCssR12_1: CssR12.1 Reg12.18 | length 172.5
  Top Layer w11.81: Reg12.18@2904.04,1764.27 2904.37,1763.94 2939.66,1763.94 2958.66,1744.94 v2(2958.66,1739.17) ; v2(2999.02,1781.5) 3001.68,1781.5 3006.01,1777.17 3028.94,1777.17 CssR12.1
  Bottom Layer w11.81: v2(2958.66,1739.17) 2958.66,1740.16 2999.02,1780.51 v2(2999.02,1781.5)
NetCvc1R12_1: Cvc1R12.1 Reg12.20 RvcR12.1 | length 266.3
  Top Layer w11.81: Reg12.20 2954.01,1815.95 2960.9,1809.06 Cvc1R12.1@3101.78,1809.06 ; RvcR12.1 3094.49,1728.35 Cvc1R12.1
NetCvc2R12_1: Cvc2R12.1 RvcR12.2 | length 70
  Top Layer w11.81: RvcR12.2 3159.45,1730.31 Cvc2R12.1
NetCvccR12_1: CvccR12.1 Reg12.8 Rgood.1 | length 449.1
  Top Layer w11.81: CvccR12.1 2443.11,1706.5 Rgood.1 2448.82,1706.69 v2(2448.82,1794.29) ; v2(2624.51,1840.06) 2625.98,1841.54 Reg12.8
  Bottom Layer w11.81: v2(2448.82,1794.29) 2493.85,1839.32 2623.77,1839.32 v2(2624.51,1840.06)
NetDe1_1: De1.1 Re1.2 | length 131.8
  Top Layer w11.81: De1.1 1655.51,732.48 1705.12,782.09 Re1.2
NetDe1_2: De1.2 Rdown3.1 Se1.3 | length 536
  Top Layer w11.81: Se1.3 1576.77,475.39 1733.27,631.89 Rdown3.1 1749.02,631.89 1781.5,664.37 De1.2
NetDe2_1: De2.1 Re3.2 | length 131.8
  Top Layer w11.81: Re3.2 1958.27,782.09 2007.87,732.48 De2.1
NetDr5_1: Dr5.1 Lr5.1 Reg5.2 | length 702.5
  Top Layer w45.67: Reg5.2@3217.72,633.86 3209.65,625.79 3209.65,494.29 3260.04,443.9 Dr5.1 3326.77,455.91 3414.96,544.09 3530.32,544.09 3615.35,629.13 Lr5.1@3615.35,678.35
NetLED_5_2: LED_5.2 R_5.1 | length 77.8
  Top Layer w11.81: R_5.1 4777.62,671.26 LED_5.2
NetLED_12_2: LED_12.2 R_12.1 | length 121.7
  Top Layer w11.81: R_12.1 4668.31,1495.08 4728.35,1555.12 4739.17,1555.12 LED_12.2
NetLED_++_2: LED_++.2 R_++.1 | length 72.3
  Top Layer w11.81: R_++.1 2534.45,615.16 LED_++.2
NetQbg1R12_1: Qbg1R12.1 Reg12.1 | length 1141.4
  Top Layer w11.81: v2@2631.92,2031.5 v2(2631.03,2030.61) v2@2633.7,2030.61
  Top Layer w19.68: Qbg1R12.1 v2(1859.84,2575.39) ; v2@2631.92,2031.5 2682.09,2031.5 Reg12.1@2689.96,2023.62
  Bottom Layer w19.68: v2(1859.84,2575.39) 2404.63,2030.61 v2(2631.03,2030.61)
NetQbg2R12_1: Qbg2R12.1 Reg12.28 | length 883.3
  Top Layer w19.68: 2887.8,2030.51 2940.93,2030.51 2941.13,2030.71 2945.41,2030.71 v2(2945.79,2031.08) ; v3(3454.72,2358.27) 3454.72,2358.8 3466.54,2370.61 3466.54,2386.22 3476.38,2396.06 Qbg2R12.1
  Bottom Layer w19.68: v2(2945.79,2031.08) 2986.79,2031.08 3097.44,2141.73 3097.44,2308.12 3147.59,2358.27 v3(3454.72,2358.27)
NetQeN_1: QeN.1 Re1.1 Re3.1 Re4.1 | length 421.2
  Top Layer w11.81: QeN.1@1742.52,933.07 1742.52,885.83 1779.92,848.43 Re1.1 1779.92,832.68 1833.66,778.94 ; Re4.1 1833.66,778.94 ; Re3.1 1883.46,832.68 1833.66,782.87 1833.66,778.94
NetQeN_4: QeN.4 QeP.1 Rup1.1 | length 567.6
  Top Layer w11.81: QeP.1 1546.26,1371.06 1644.69,1272.64 1832.68,1272.64 QeN.4@1832.68,1264.76 ; QeN.4 1875.98,1201.77 Rup1.1
NetQtg1R12_1: Qtg1R12.1 Reg12.4 | length 625.5
  Top Layer w11.81: Qtg1R12.1 2111.61,2080.71 2117.52,2086.61 Qtg1R12.1@2121.46,2082.68 ; v5(2631.89,1942.91) 2632.38,1943.41 2673.72,1943.41 Reg12.4
  Top Layer w19.68: Qtg1R12.1@2121.46,2082.68 v2(2187.99,2082.68)
  Bottom Layer w19.68: v2(2187.99,2082.68) 2305.12,2082.68 2400.59,1987.2 2587.6,1987.2 v5(2631.89,1942.91)
NetQtg2R12_1: Qtg2R12.1 Reg12.25 | length 759.8
  Top Layer w11.81: Reg12.25 2949.11,1943.9 2953.05,1939.96 v2(2955.71,1939.96)
  Bottom Layer w19.68: v2(2955.71,1939.96) 2955.71,1954.72 3128.94,2127.95 3128.94,2293.31 3158.46,2322.83 v3(3398.62,2322.83)
NetReg12_6: Lr12.1 Reg12.6 Rsense1R12.2 Rsense2R12.2 | length 631.9
  Top Layer w11.81: Rsense1R12.2 2432.09,2222.44 2360.27,2222.44 2353.35,2215.52 2353.35,2077.76 2541.34,1889.76 2638.31,1889.76 2639.08,1890.53 2644.66,1890.53 2645.25,1891.12 2672.62,1891.12 Reg12.6
NetReg12_9: Reg12.9 Ren1.1 Ren2.2 | length 298.4
  Top Layer w11.81: Ren2.2 2496.06,1778.54 2507.87,1766.73 2507.87,1736.22 2540.35,1703.74 Ren1.1 2569.88,1703.74 2611.86,1745.72 2611.86,1786.54 2639.67,1814.35 2672.62,1814.35 Reg12.9
NetReg12_17: Reg12.17 Rgood.2 | length 621.1
  Top Layer w11.81: Rgood.2 2458.66,1593.5 2513.75,1538.41 2741.14,1538.41 2741.14,1634.84 2845.47,1739.17 Reg12.17
NetReg12_19: Reg12.19 Rfb1R12.2 Rfb2R12.1 RfbT.2 RfbT.3 | length 556.2
  Top Layer w11.81: Reg12.19 2905.35,1789.53 2949.58,1789.53 2986.38,1752.73 2986.38,1652.72 Rfb2R12.1 2974.41,1587.27 Rfb1R12.2@2948.16,1561.02 ; Rfb1R12.2 Rfb1R12.2@2948.16,1561.02 ; RfbT.2 3073.82,1427.17 3036.42,1464.57 RfbT.3 3030.51,1561.02 Rfb1R12.2@2948.16,1561.02
NetReg12_21: Reg12.21 RrtR12.1 | length 176.6
  Top Layer w11.81: Reg12.21 2959.26,1841.54 2969.93,1830.87 3029.69,1830.87 3058.07,1859.25 RrtR12.1@3064.96,1859.25
P1+: CinR5.1 Jin+.1 Jin+.2 Jin+.3 Jin+.4 Jin+.5 Jin+.6 QeP.2 Reg5.1 Rup1.2 RV1.1 Se1.2 | length 171.2
  Top Layer w10: CinR5.1@2831.69,831.69 CinR5.1
  Top Layer w11.81: QeP.2 QeP.2@1497.6,1101.38
  Top Layer w45.67: CinR5.1 2831.69,918.31 CinR5.1@2850.2,936.81
  other v1: 1374.02,1057.09 1430.45,1057.09 1486.88,1057.09 1543.31,1057.09 1374.02,1115.16 1430.45,1115.16 1486.88,1115.16 1543.31,1115.16 1374.02,1173.23 1430.45,1173.23 1486.88,1173.23 1543.31,1173.23 1374.02,1231.3 1430.45,1231.3 1486.88,1231.3 1543.31,1231.3
P1++: Cin1r12.1 Cin2r12.1 Cin3r12.1 Cin4r12.1 Cin5r12.1 Cin6r12.1 Cin7r12.1 Cin8r12.1 CVinR12.1 QeP.3 Qtg1R12.4 R_++.2 Reg12.7 Ren2.1 | length 90.6
  Top Layer w11.81: CVinR12.1 2600.59,1867.13 Reg12.7@2650.59,1867.13
  other v1: 1758.86,1971.46 1815.29,1971.46 1871.72,1971.46 1928.15,1971.46 1758.86,2017.72 1815.29,2017.72 1871.72,2017.72 1928.15,2017.72 1758.86,2075.79 1815.29,2075.79 1871.72,2075.79 1928.15,2075.79 1758.86,2133.86 1815.29,2133.86 1871.72,2133.86 1928.15,2133.86 1758.86,2191.93 1815.29,2191.93 1871.72,2191.93 1928.15,2191.93 1758.86,2250 1815.29,2250 1871.72,2250 1928.15,2250
P1-: Cin1r12.2 Cin2r12.2 Cin3r12.2 Cin4r12.2 Cin5r12.2 Cin6r12.2 Cin7r12.2 Cin8r12.2 CinR5.2 Cout1R12.2 Cout2R12.2 Cout3R12.2 Cout4R12.2 Cout5R12.2 Cout6R12.2 Cout7R12.2 Cout8R12.2 CoutR5.2 CrefR12.2 CssR12.2 Cv.1 Cvc1R12.2 Cvc2R12.2 CvccR12.2 CVinR12.2 CvoutR12.2 Dr5.2 J5.2 J12.2 Jin-.1 Jin-.2 Jin-.3 Jin-.4 Jin-.5 Jin-.6 LED_5.1 LED_12.1 LED_++.1 pad.3 Qbg1R12.3 Qbg2R12.3 QeN.3 Rdown2.2 Rdown3.2 Re4.2 Reg5.3 Reg5.5 Reg5.6 Reg12.10 Reg12.22 Reg12.29 Ren1.2 Rfb2R12.2 RfbT.1 RrtR12.2 RV2.1 | length 2204.9
  Top Layer w11.81: Qbg1R12.3@1744.09,2395.08 Qbg1R12.3 ; QeN.3 2019.98,979.33 RV2.1 ; RV2.1@2032.78,978.35 v2(2071.85,978.35) Cv.1@2111.61,978.35 ; CvccR12.2 2348.03,1594.69 2397.05,1643.7 2482.28,1643.7 2540.35,1585.63 Ren1.2 2571.65,1569.09 2670.47,1569.09 2688.98,1587.6 2688.98,1601.97 CrefR12.2 2703.15,1625 2717.32,1639.17 2717.32,1645.46 2789.37,1717.51 Reg12.29@2789.37,1838.39 ; v2(2540.48,1770.56) 2540.48,1784.41 2570.63,1784.41 CVinR12.2 ; Reg12.10 2741.34,1790.35 Reg12.29@2789.37,1838.39 ; Reg12.29 Reg12.29@2789.37,1838.39 ; Reg12.29@2802.17,1867.13 Reg12.22 2999.8,1867.13 CvoutR12.2 ; CssR12.2@3033.46,1712.6 CssR12.2@3037.6,1712.6 ; CssR12.2 3039.76,1712.6 3049.21,1703.15 Rfb2R12.2@3049.21,1656.5 ; Rfb2R12.2 3051.18,1642.72 v2(3092.52,1642.72) 3115.16,1620.08 RfbT.1 ; RrtR12.2@3061.02,1930.12 RrtR12.2@3075.79,1930.12 ; RrtR12.2@3074.8,1931.1 RrtR12.2@3075.79,1930.12 ; Cvc2R12.2 3219.49,1790.35 Cvc1R12.2 3157.48,1833.17 v2(3135.83,1854.82) 3135.83,1870.08 RrtR12.2@3075.79,1930.12 ; Reg5.5@3419.29,630.91 Reg5.5@3419.29,649.21 ; Dr5.2 Dr5.2@3513.78,457.68
  Top Layer w45.67: Reg5.3@3287.4,633.86 3287.4,559.55 v4(3288.39,558.56) ; Reg5.5@3424.17,647.64 v4(3501.97,647.64)
  Bottom Layer w11.81: v2(3092.52,1642.72) 3092.52,1796.26 3135.83,1839.57 v2(3135.83,1854.82)
  other v1: 3205.71,991.14 3262.14,991.14 3318.57,991.14 3375,991.14 3205.71,1049.21 3262.14,1049.21 3318.57,1049.21 3375,1049.21 3205.71,1107.28 3262.14,1107.28 3318.57,1107.28 3375,1107.28 3205.71,1165.35 3262.14,1165.35 3318.57,1165.35 3375,1165.35 2755.91,1796.26 2794.29,1796.26 2828.74,1796.26 2757.87,1850.07 2793.31,1850.07 2828.74,1850.07 2793.31,1891.73 2828.74,1891.73 2793.31,1930.12 2828.74,1930.12
P1V: Cv.2 Jsignal.1 RV1.2 RV2.2 | length 302.9
  Top Layer w11.81: RV2.2 RV1.2 2195.87,831.69 2229.33,798.23 Jsignal.1
Signal: De2.2 Jsignal.2 Rdown2.1 | length 612.6
  Top Layer w11.81: Rdown2.1 1923.23,631.89 1881.89,673.23 De2.2 1940.95,729.33 1982.28,687.99 2211.61,687.99 2308.07,784.45 Jsignal.2
pads on no net: J5.3 J12.3 Jsignal.MP1 Jsignal.MP2 Qbg1R12.2 Qbg2R12.2 QeN.2 Qtg1R12.2 Qtg2R12.2 Reg5.7 Reg5.8 Reg12.16 Reg12.23 Se1.1

## Polygon pours and split planes (outlines as drawn)
P1++ on Top Layer "P1++_L01_P005" (solid, remove dead copper, pour order 5): 350.39,2283.46 350.39,1712.6 1137.8,1712.6 1147.8,1342.52 1491.08,1342.52 1569.39,1326.28 1617.13,1188.98 2097.44,1188.98 2151.57,1188.98 2724.41,1188.98 3026.57,1188.98 3062.99,1188.98 3062.99,1349.08 2858.27,1496.06 2709.65,1567.91 2709.65,2019.33 2027.2,2019.33 2027.2,2283.46
P1- on Top Layer "P1-_L01_P017" (solid, remove dead copper, pour order 17): 10,10 5447.68,10 5447.68,2941.77 10,2941.77
NetCbst2R12_1 on Top Layer "NETCBST2R12_1_L01_P001" (solid, pour order 1): 2901.76,2594.49 3337.6,2594.49 3337.6,2194.88 2901.76,2194.88
NetCbst1R12_1 on Top Layer "NETCBST1R12_1_L01_P010" (solid, pour order 10): 1880.91,2614.17 1881.89,2613.19 1881.89,2285.43 2028.54,2285.43 2028.54,2197.83 2255.91,2197.83 2255.91,2614.17
1_12V on Top Layer "1_12V_L01_P007" (solid, remove dead copper, pour order 7): 3144.4,1255.35 3144.4,1480.32 3144.4,1617.13 3144.4,1687.01 3242.01,1687.01 3244.21,1952.22 3347.93,2016.09 3601.38,2025.77 4014.81,2025.77 4014.81,1919.29 4660.43,1919.29 4660.43,1138.78 3144.4,1138.78
1_5V on Top Layer "1_5V_L01_P009" (solid, pour order 9): 3120.08,507.22 4090.61,508.65 4090.61,609.1 4533.18,609.1 4658.46,609.1 4658.46,1138.78 3120.08,1138.78
P1+ on Top Layer "P1+_L01_P011" (solid, pour order 11): 2085.63,1196.57 3113.19,1196.57 3166.34,705.71 3166.34,637.8 2706.7,637.8 2503.95,840.55 2257.2,840.55 2172.24,980.31 2156.5,955.71 1918.31,1046.22 1710.63,1046.22 1708.67,980.31 1649.61,980.32 1597.2,1046.22 1596.07,1138.95 1659.36,1242.08 1918.31,1136.81
P1+ on Top Layer "P1+_L01_P006" (solid, remove dead copper, pour order 6): 1216.54,728.35 1216.54,551.18 1662.4,551.18 1662.4,1321.85 340.55,1321.85 340.55,728.35
NetCout1R12_1 on Top Layer "NETCOUT1R12_1_L01_P002" (solid, pour order 2): 3410.59,1874.02 3628.94,1874.02 3628.94,2324.8 3410.59,2324.8
P1- on Bottom Layer "P1-_L02_P016" (solid, pour order 16): 10,2941.77 5447.68,2941.77 5447.68,10 10,10
P1++ on Bottom Layer "P1++_L02_P012" (solid, pour order 12): 1639.76,2283.46 1639.76,1888.78 2088.58,1888.78 2088.58,2283.46
P1+ on Bottom Layer "P1+_L02_P015" (solid, pour order 15): 1174.21,1350.39 1174.21,962.6 1660.43,962.6 1660.43,1350.39
NetCbst2R12_1 on Bottom Layer "NETCBST2R12_1_L02_P013" (solid, pour order 13): 2902.56,2620.08 3380.91,2620.08 3380.91,2312.99 3274.15,2313.19 3274.15,2195.87 2902.56,2195.87
NetCout1R12_1 on Bottom Layer "NETCOUT1R12_1_L02_P014" (solid, pour order 14): 3180.12,2192.91 3180.12,1814.96 3642.72,1814.96 3642.72,2323.82 3285.43,2323.82 3285.43,2192.91
NetCbst1R12_1 on Bottom Layer "NETCBST1R12_1_L02_P000" (solid, pour order 0): 1845.47,2639.76 1845.47,2302.17 2340.55,2302.17 2340.55,2639.76

## Other copper
Top Layer:
  rectangle net NetCout1R12_1: 4106.3,2069.88 4607.28,2271.65
  rectangle net NetCout1R12_1: 3625.98,2112.2 3940.95,2324.8
  rectangle net NetReg12_6: 2406.5,2161.42 2525.59,2464.57
  pour cut-out: 2894.68,2620.4 2896.12,2620.4 2896.12,2466.56 2894.68,2047.24 2628.94,2047.24 2500,2176.18 2500,2620.4
  pour cut-out: 3603.35,949.8 3604.33,950.79 4075.79,950.79 4075.79,479.33 4076.77,478.35 3602.36,478.35
  region net NetCout1R12_1: 3937.99,2112.96 3937.99,2324.8 4108.27,2271.65 4108.27,2069.38
Bottom Layer:
  pour cut-out: 3604.33,951.77 3604.33,480.32 3605.32,480.32 4075.79,480.32 4074.8,949.8 4075.79,950.79
  pour cut-out: 2530.51,2612.2 2531.5,2611.22 2531.5,2122.05 3000.98,2123.79 3076.77,2121.1 3076.77,2249.06 2999.95,2249.06 3000.98,2612.2

## Silkscreen, mask and mechanical layers (free items; w line width, h text height)
Top Overlay:
  drawing of 14 lines, arcs and shapes, not listed
  text "GND" at 2613.19,2734.25 h118.11
  text "Vin+" at 1660.43,1628.94 h118.11
  text "12V" at 4061.02,1320.87 h118.11
  text "GND" at 192.91,1177.17 h118.11 r90
  text "Vin" at 1213.58,932.09 h118.11 r90
  text "5V" at 4182.09,920.28 h118.11
  text "GND" at 4955.71,589.57 h118.11
  text "GND" at 2961.61,125.98 h118.11
Bottom Solder:
  region: 3293.36,2187.91 3274.15,2175.07 3180.12,2175.07 3180.12,2113.05 3185.12,2108.82 3642.72,2108.82 3642.72,2323.82 3433.07,2323.82 3415.86,2292.98 3382.95,2292.34 3294.95,2292.34
  region: 1639.76,2283.46 1639.76,1888.78 2088.58,1888.78 2088.58,2277.3 2083.58,2281.41
  region: 1174.21,1350.39 1174.21,962.6 1660.43,962.6 1660.43,1350.39
  region: 1845.47,2639.76 1845.47,2607.73 1848.94,2604.27 1886.4,2591.29 2175.52,2302.17 2340.55,2302.17 2340.55,2639.76
  region: 1845.47,2540.1 1845.47,2302.17 2083.41,2302.17 2085.32,2306.78 1850.73,2542.66
  region: 3208.82,2032.53 3180.12,2003.83 3180.12,1814.96 3642.72,1814.96 3642.72,2032.53
  region: 3154.51,2280.67 3154.51,2195.87 3274.15,2195.87 3274.15,2299.23 3173.07,2299.23
  region: 2999.95,2620.08 2999.95,2249.06 3067.24,2249.06 3067.24,2308.42 3067.98,2316.02 3132.34,2384.68 3147.59,2388.76 3380.91,2388.76 3380.91,2620.08
Mechanical 15:
  lines w10: 0,0 5457.68,0 5457.68,2951.77 5446.85,2951.77 0,2951.77 0,0
Drill Drawing:
  the board outline again, w10